# EAGLE board 301_Photodiode_Board_Array (EAGLE 9.6.2)
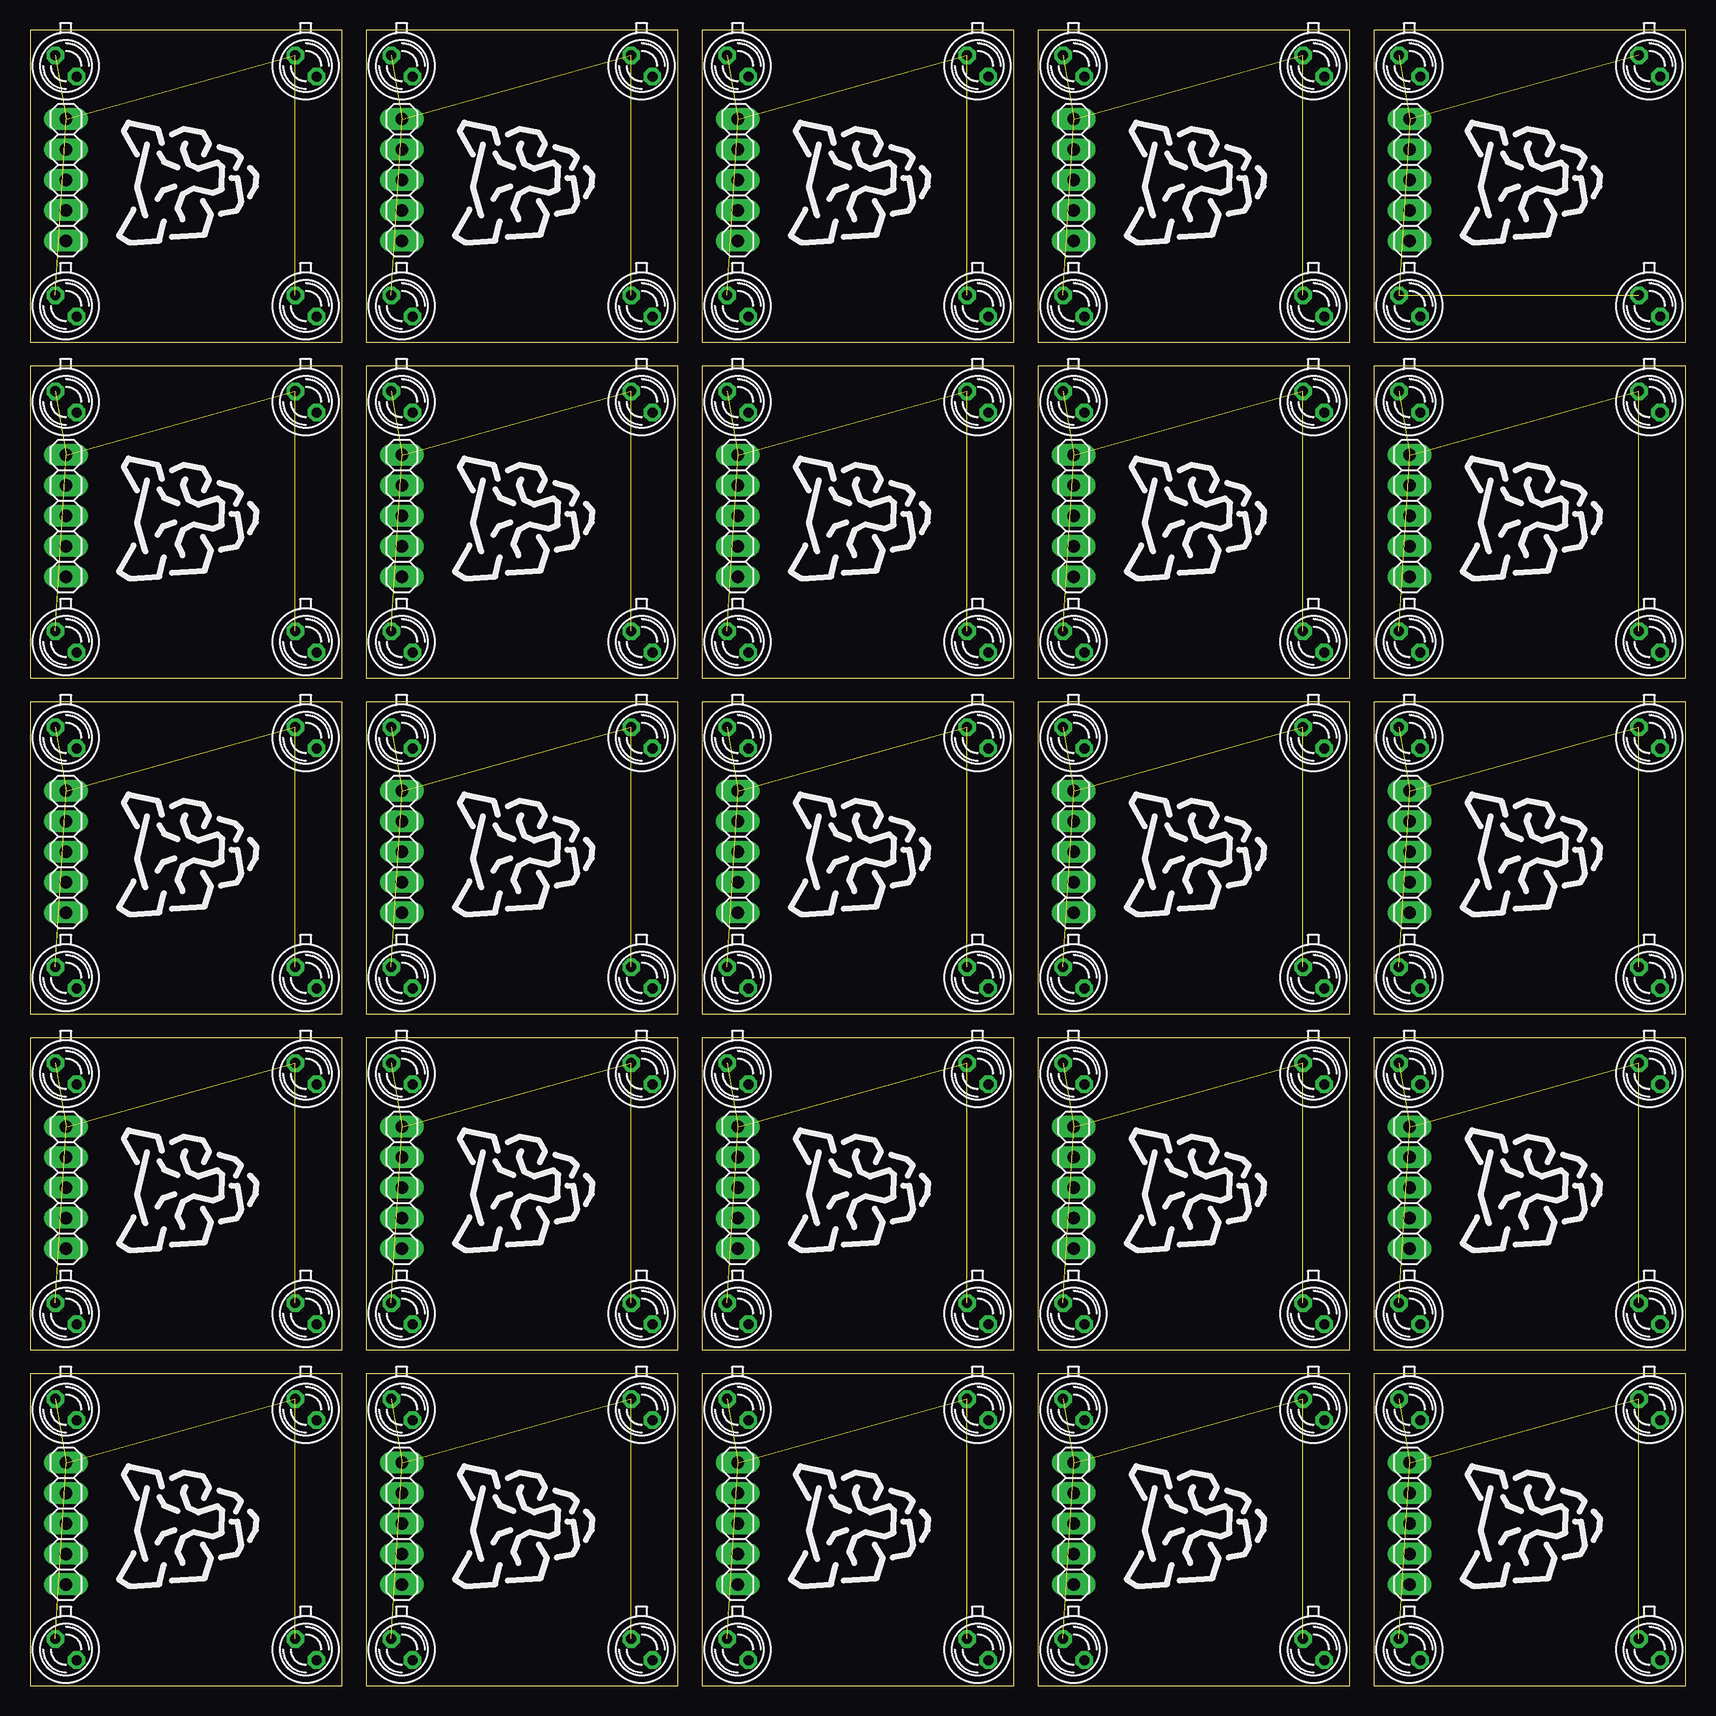
[diagram p0: board, top side]
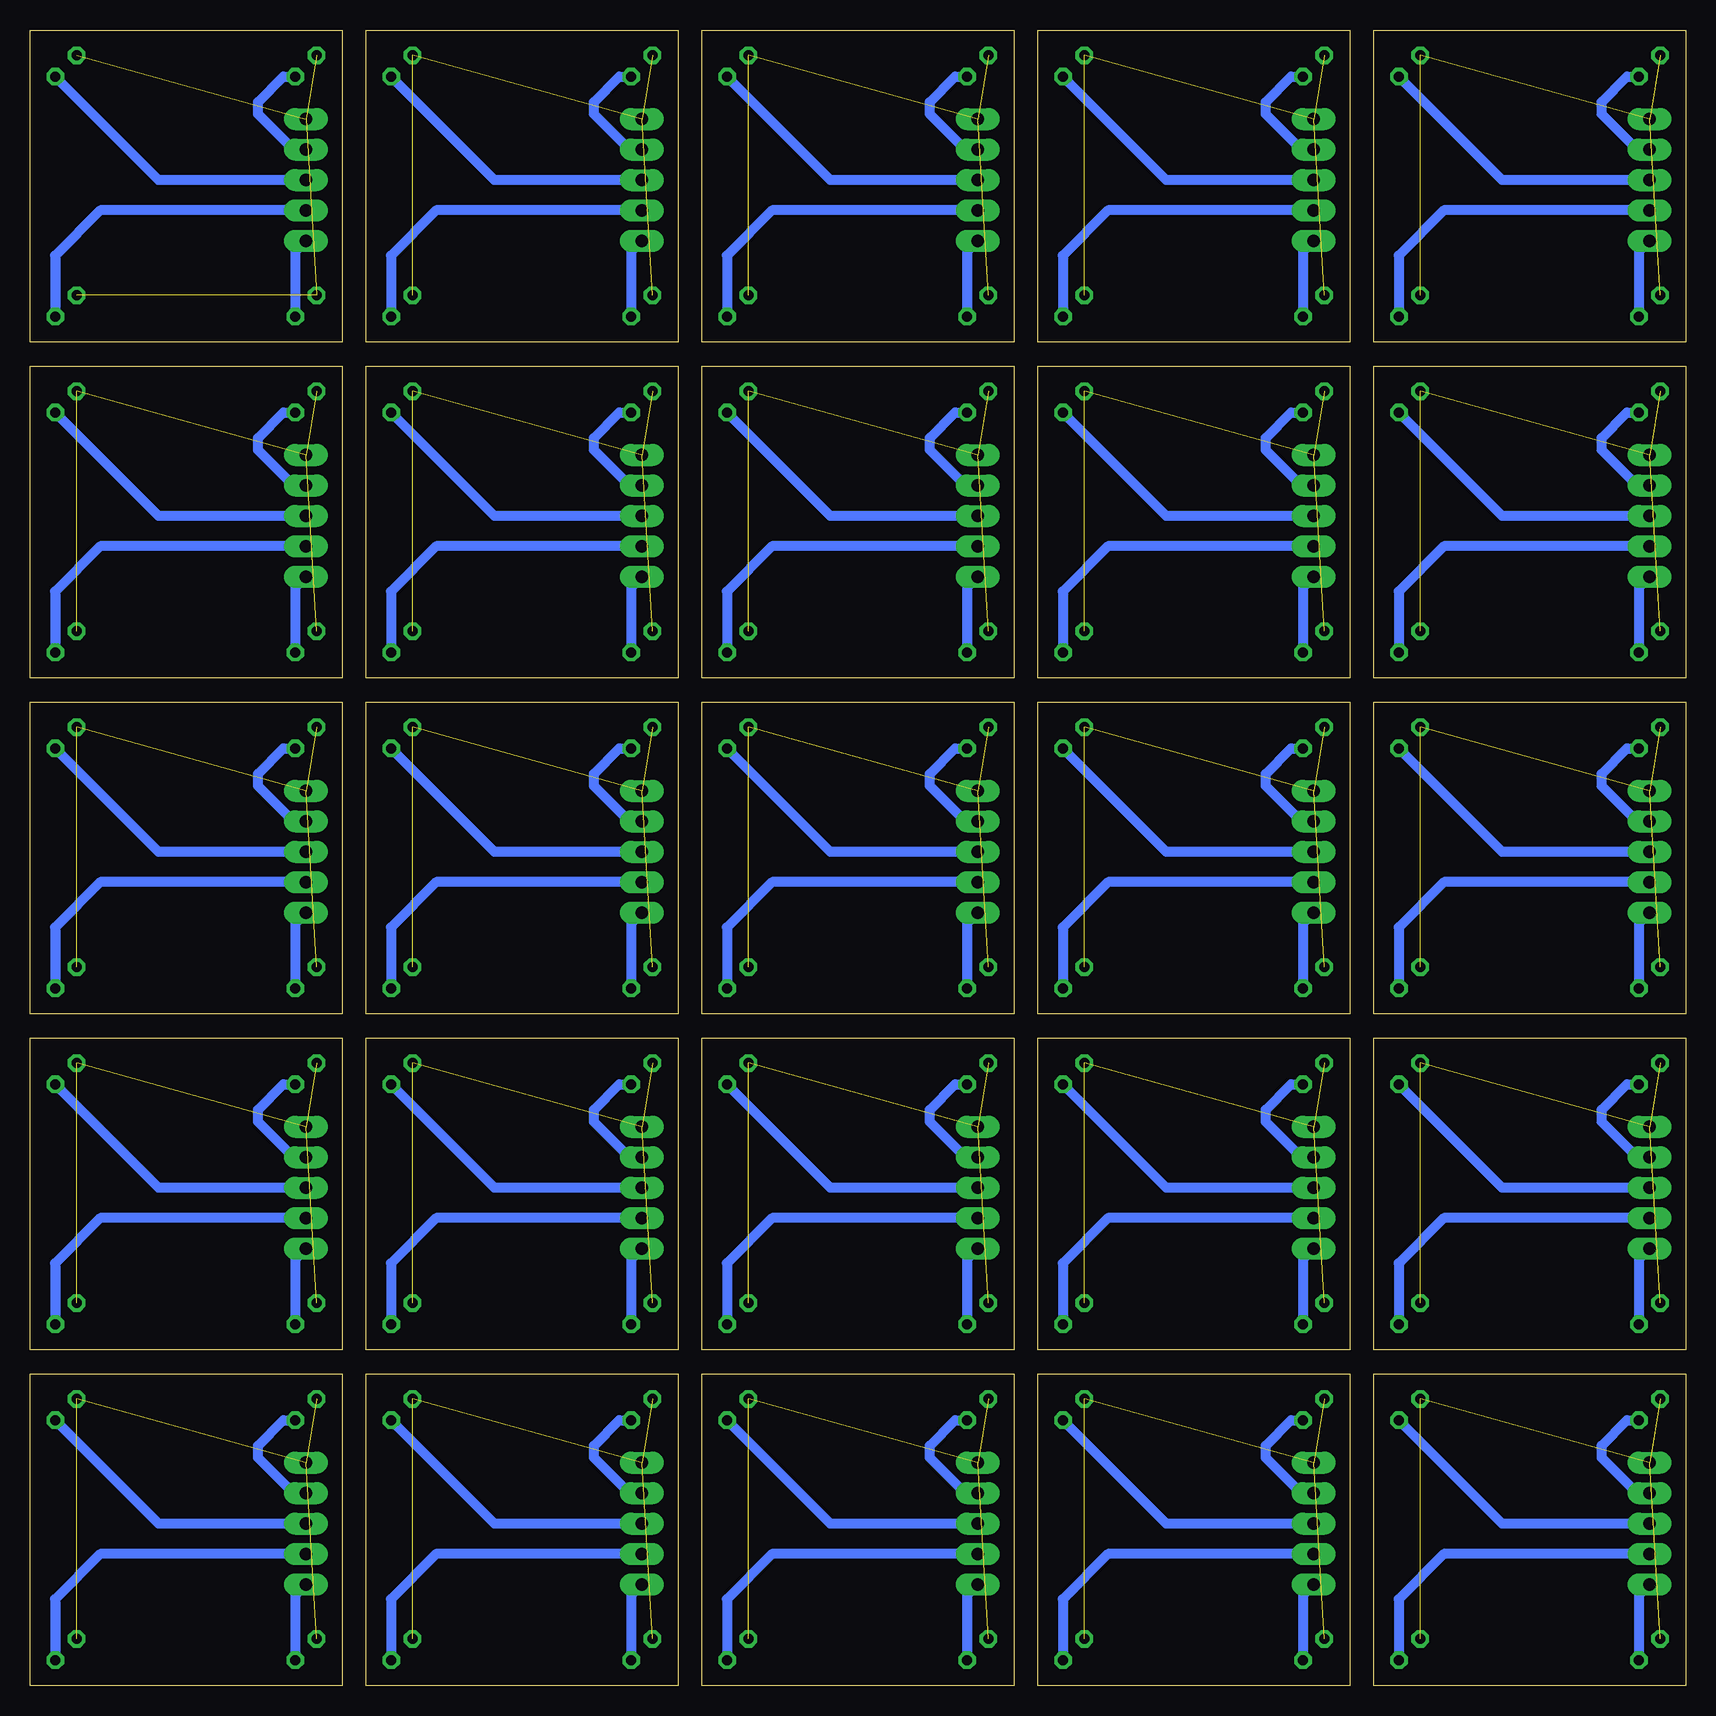
[diagram p1: board, bottom side, seen from below]

Size 138 x 138 mm. Coordinates in mm from the lower left corner, seen from the top.
Outline: 0,0 26,0 26,26 0,26 0,0
Outline: 0,28 26,28 26,54 0,54 0,28
Outline: 0,56 26,56 26,82 0,82 0,56
Outline: 0,84 26,84 26,110 0,110 0,84
Outline: 0,112 26,112 26,138 0,138 0,112
Outline: 28,0 54,0 54,26 28,26 28,0
Outline: 28,28 54,28 54,54 28,54 28,28
Outline: 28,56 54,56 54,82 28,82 28,56
Outline: 28,84 54,84 54,110 28,110 28,84
Outline: 28,112 54,112 54,138 28,138 28,112
Outline: 56,0 82,0 82,26 56,26 56,0
Outline: 56,28 82,28 82,54 56,54 56,28
Outline: 56,56 82,56 82,82 56,82 56,56
Outline: 56,84 82,84 82,110 56,110 56,84
Outline: 84,84 110,84 110,110 84,110 84,84
Outline: 84,56 110,56 110,82 84,82 84,56
Outline: 84,28 110,28 110,54 84,54 84,28
Outline: 84,0 110,0 110,26 84,26 84,0
Outline: 56,112 82,112 82,138 56,138 56,112
Outline: 84,112 110,112 110,138 84,138 84,112
Outline: 112,112 138,112 138,138 112,138 112,112
Outline: 112,84 138,84 138,110 112,110 112,84
Outline: 112,56 138,56 138,82 112,82 112,56
Outline: 112,28 138,28 138,54 112,54 112,28
Outline: 112,0 138,0 138,26 112,26 112,0
Copper layers (1*16): Top 0.035mm / dielectric 1.6mm / Bottom 0.035mm
Design rules "jlcpcb-2layers": minimum track width 5mil, minimum drill 0.3mm, track to track 5mil, track to pad 5mil, pad to pad 5mil, via to via 5mil, smd to smd 5mil, copper to edge 0.2mm, drill to drill 6mil, minimum pad ring 10mil, minimum via ring 3mil, stop-mask expansion 4mil, vias tented up to drill 0mil, thermal gap 10mil

## Footprints (pad centres in the part's own frame; a part is rotated, then mirrored left to right if it is on the bottom)
BPX65 = drill 0.813 octagon: A -0.889,-0.889; K 0.889,0.889
1X05 = drill 1.016 long: 1 -5.08,0; 2 -2.54,0; 3 0,0; 4 2.54,0; 5 5.08,0

## Placement (x,y rotation side)
D1  BPX65  [BPX65]  3,3 270 top
D2  BPX65  [BPX65]  23,3 270 top
D3  BPX65  [BPX65]  23,23 270 top
D4  BPX65  [BPX65]  3,23 270 top
D5  BPX65  [BPX65]  3,31 270 top
D6  BPX65  [BPX65]  23,31 270 top
D7  BPX65  [BPX65]  23,51 270 top
D8  BPX65  [BPX65]  3,51 270 top
D9  BPX65  [BPX65]  3,59 270 top
D10  BPX65  [BPX65]  23,59 270 top
D11  BPX65  [BPX65]  23,79 270 top
D12  BPX65  [BPX65]  3,79 270 top
D13  BPX65  [BPX65]  3,87 270 top
D14  BPX65  [BPX65]  23,87 270 top
D15  BPX65  [BPX65]  23,107 270 top
D16  BPX65  [BPX65]  3,107 270 top
D17  BPX65  [BPX65]  3,115 270 top
D18  BPX65  [BPX65]  23,115 270 top
D19  BPX65  [BPX65]  23,135 270 top
D20  BPX65  [BPX65]  3,135 270 top
D21  BPX65  [BPX65]  31,3 270 top
D22  BPX65  [BPX65]  51,3 270 top
D23  BPX65  [BPX65]  51,23 270 top
D24  BPX65  [BPX65]  31,23 270 top
D25  BPX65  [BPX65]  31,31 270 top
D26  BPX65  [BPX65]  51,31 270 top
D27  BPX65  [BPX65]  51,51 270 top
D28  BPX65  [BPX65]  31,51 270 top
D29  BPX65  [BPX65]  31,59 270 top
D30  BPX65  [BPX65]  51,59 270 top
D31  BPX65  [BPX65]  51,79 270 top
D32  BPX65  [BPX65]  31,79 270 top
D33  BPX65  [BPX65]  31,87 270 top
D34  BPX65  [BPX65]  51,87 270 top
D35  BPX65  [BPX65]  51,107 270 top
D36  BPX65  [BPX65]  31,107 270 top
D37  BPX65  [BPX65]  31,115 270 top
D38  BPX65  [BPX65]  51,115 270 top
D39  BPX65  [BPX65]  51,135 270 top
D40  BPX65  [BPX65]  31,135 270 top
D41  BPX65  [BPX65]  59,3 270 top
D42  BPX65  [BPX65]  79,3 270 top
D43  BPX65  [BPX65]  79,23 270 top
D44  BPX65  [BPX65]  59,23 270 top
D45  BPX65  [BPX65]  59,31 270 top
D46  BPX65  [BPX65]  79,31 270 top
D47  BPX65  [BPX65]  79,51 270 top
D48  BPX65  [BPX65]  59,51 270 top
D49  BPX65  [BPX65]  59,59 270 top
D50  BPX65  [BPX65]  79,59 270 top
D51  BPX65  [BPX65]  79,79 270 top
D52  BPX65  [BPX65]  59,79 270 top
D53  BPX65  [BPX65]  59,87 270 top
D54  BPX65  [BPX65]  79,87 270 top
D55  BPX65  [BPX65]  79,107 270 top
D56  BPX65  [BPX65]  59,107 270 top
D57  BPX65  [BPX65]  87,87 270 top
D58  BPX65  [BPX65]  107,87 270 top
D59  BPX65  [BPX65]  107,107 270 top
D60  BPX65  [BPX65]  87,107 270 top
D61  BPX65  [BPX65]  87,59 270 top
D62  BPX65  [BPX65]  107,59 270 top
D63  BPX65  [BPX65]  107,79 270 top
D64  BPX65  [BPX65]  87,79 270 top
D65  BPX65  [BPX65]  87,31 270 top
D66  BPX65  [BPX65]  107,31 270 top
D67  BPX65  [BPX65]  107,51 270 top
D68  BPX65  [BPX65]  87,51 270 top
D69  BPX65  [BPX65]  87,3 270 top
D70  BPX65  [BPX65]  107,3 270 top
D71  BPX65  [BPX65]  107,23 270 top
D72  BPX65  [BPX65]  87,23 270 top
D73  BPX65  [BPX65]  59,115 270 top
D74  BPX65  [BPX65]  79,115 270 top
D75  BPX65  [BPX65]  79,135 270 top
D76  BPX65  [BPX65]  59,135 270 top
D77  BPX65  [BPX65]  87,115 270 top
D78  BPX65  [BPX65]  107,115 270 top
D79  BPX65  [BPX65]  107,135 270 top
D80  BPX65  [BPX65]  87,135 270 top
D81  BPX65  [BPX65]  115,115 270 top
D82  BPX65  [BPX65]  135,115 270 top
D83  BPX65  [BPX65]  135,135 270 top
D84  BPX65  [BPX65]  115,135 270 top
D85  BPX65  [BPX65]  115,87 270 top
D86  BPX65  [BPX65]  135,87 270 top
D87  BPX65  [BPX65]  135,107 270 top
D88  BPX65  [BPX65]  115,107 270 top
D89  BPX65  [BPX65]  115,59 270 top
D90  BPX65  [BPX65]  135,59 270 top
D91  BPX65  [BPX65]  135,79 270 top
D92  BPX65  [BPX65]  115,79 270 top
D93  BPX65  [BPX65]  115,31 270 top
D94  BPX65  [BPX65]  135,31 270 top
D95  BPX65  [BPX65]  135,51 270 top
D96  BPX65  [BPX65]  115,51 270 top
D97  BPX65  [BPX65]  115,3 270 top
D98  BPX65  [BPX65]  135,3 270 top
D99  BPX65  [BPX65]  135,23 270 top
D100  BPX65  [BPX65]  115,23 270 top
JP1  [1X05]  3,13.5 90 top
JP2  [1X05]  3,41.5 90 top
JP3  [1X05]  3,69.5 90 top
JP4  [1X05]  3,97.5 90 top
JP5  [1X05]  3,125.5 90 top
JP6  [1X05]  31,13.5 90 top
JP7  [1X05]  31,41.5 90 top
JP8  [1X05]  31,69.5 90 top
JP9  [1X05]  31,97.5 90 top
JP10  [1X05]  31,125.5 90 top
JP11  [1X05]  59,13.5 90 top
JP12  [1X05]  59,41.5 90 top
JP13  [1X05]  59,69.5 90 top
JP14  [1X05]  59,97.5 90 top
JP15  [1X05]  87,97.5 90 top
JP16  [1X05]  87,69.5 90 top
JP17  [1X05]  87,41.5 90 top
JP18  [1X05]  87,13.5 90 top
JP19  [1X05]  59,125.5 90 top
JP20  [1X05]  87,125.5 90 top
JP21  [1X05]  115,125.5 90 top
JP22  [1X05]  115,97.5 90 top
JP23  [1X05]  115,69.5 90 top
JP24  [1X05]  115,41.5 90 top
JP25  [1X05]  115,13.5 90 top
U$1  COUGAR_LOGO_LARGE  [LRG_COUGAR]  19.11,35.89 90 top
U$2  COUGAR_LOGO_LARGE  [LRG_COUGAR]  19.11,7.89 90 top
U$3  COUGAR_LOGO_LARGE  [LRG_COUGAR]  19.11,63.89 90 top
U$4  COUGAR_LOGO_LARGE  [LRG_COUGAR]  19.11,91.89 90 top
U$5  COUGAR_LOGO_LARGE  [LRG_COUGAR]  19.11,119.89 90 top
U$6  COUGAR_LOGO_LARGE  [LRG_COUGAR]  47.11,7.89 90 top
U$7  COUGAR_LOGO_LARGE  [LRG_COUGAR]  47.11,35.89 90 top
U$8  COUGAR_LOGO_LARGE  [LRG_COUGAR]  47.11,63.89 90 top
U$9  COUGAR_LOGO_LARGE  [LRG_COUGAR]  47.11,91.89 90 top
U$10  COUGAR_LOGO_LARGE  [LRG_COUGAR]  47.11,119.89 90 top
U$11  COUGAR_LOGO_LARGE  [LRG_COUGAR]  75.11,7.89 90 top
U$12  COUGAR_LOGO_LARGE  [LRG_COUGAR]  75.11,35.89 90 top
U$13  COUGAR_LOGO_LARGE  [LRG_COUGAR]  75.11,63.89 90 top
U$14  COUGAR_LOGO_LARGE  [LRG_COUGAR]  75.11,91.89 90 top
U$15  COUGAR_LOGO_LARGE  [LRG_COUGAR]  103.11,91.89 90 top
U$16  COUGAR_LOGO_LARGE  [LRG_COUGAR]  103.11,63.89 90 top
U$17  COUGAR_LOGO_LARGE  [LRG_COUGAR]  103.11,35.89 90 top
U$18  COUGAR_LOGO_LARGE  [LRG_COUGAR]  103.11,7.89 90 top
U$19  COUGAR_LOGO_LARGE  [LRG_COUGAR]  75.11,119.89 90 top
U$20  COUGAR_LOGO_LARGE  [LRG_COUGAR]  103.11,119.89 90 top
U$21  COUGAR_LOGO_LARGE  [LRG_COUGAR]  131.11,119.89 90 top
U$22  COUGAR_LOGO_LARGE  [LRG_COUGAR]  131.11,91.89 90 top
U$23  COUGAR_LOGO_LARGE  [LRG_COUGAR]  131.11,63.89 90 top
U$24  COUGAR_LOGO_LARGE  [LRG_COUGAR]  131.11,35.89 90 top
U$25  COUGAR_LOGO_LARGE  [LRG_COUGAR]  131.11,7.89 90 top

## Library data of the parts
D1-D100 = opto-trans-siemens; MPN: BPX65.; OC_FARNELL: 327451; OC_NEWARK: 06WX2764
JP1-JP25 = pinhead
U$1-U$25 = ElcPartsLibrary

## Nets
DIODE_1: D1.K JP1.1
DIODE_2: D2.K JP1.2
DIODE_3: D3.K JP1.3
DIODE_4: D4.K JP1.4
DIODE_5: D5.K JP2.1
DIODE_6: D6.K JP2.2
DIODE_7: D7.K JP2.3
DIODE_8: D8.K JP2.4
DIODE_9: D9.K JP3.1
DIODE_10: D10.K JP3.2
DIODE_11: D11.K JP3.3
DIODE_12: D12.K JP3.4
DIODE_13: D13.K JP4.1
DIODE_14: D14.K JP4.2
DIODE_15: D15.K JP4.3
DIODE_16: D16.K JP4.4
DIODE_17: D17.K JP5.1
DIODE_18: D18.K JP5.2
DIODE_19: D19.K JP5.3
DIODE_20: D20.K JP5.4
DIODE_21: D21.K JP6.1
DIODE_22: D22.K JP6.2
DIODE_23: D23.K JP6.3
DIODE_24: D24.K JP6.4
DIODE_25: D25.K JP7.1
DIODE_26: D26.K JP7.2
DIODE_27: D27.K JP7.3
DIODE_28: D28.K JP7.4
DIODE_29: D29.K JP8.1
DIODE_30: D30.K JP8.2
DIODE_31: D31.K JP8.3
DIODE_32: D32.K JP8.4
DIODE_33: D33.K JP9.1
DIODE_34: D34.K JP9.2
DIODE_35: D35.K JP9.3
DIODE_36: D36.K JP9.4
DIODE_37: D37.K JP10.1
DIODE_38: D38.K JP10.2
DIODE_39: D39.K JP10.3
DIODE_40: D40.K JP10.4
DIODE_41: D41.K JP11.1
DIODE_42: D42.K JP11.2
DIODE_43: D43.K JP11.3
DIODE_44: D44.K JP11.4
DIODE_45: D45.K JP12.1
DIODE_46: D46.K JP12.2
DIODE_47: D47.K JP12.3
DIODE_48: D48.K JP12.4
DIODE_49: D49.K JP13.1
DIODE_50: D50.K JP13.2
DIODE_51: D51.K JP13.3
DIODE_52: D52.K JP13.4
DIODE_53: D53.K JP14.1
DIODE_54: D54.K JP14.2
DIODE_55: D55.K JP14.3
DIODE_56: D56.K JP14.4
DIODE_57: D57.K JP15.1
DIODE_58: D58.K JP15.2
DIODE_59: D59.K JP15.3
DIODE_60: D60.K JP15.4
DIODE_61: D61.K JP16.1
DIODE_62: D62.K JP16.2
DIODE_63: D63.K JP16.3
DIODE_64: D64.K JP16.4
DIODE_65: D65.K JP17.1
DIODE_66: D66.K JP17.2
DIODE_67: D67.K JP17.3
DIODE_68: D68.K JP17.4
DIODE_69: D69.K JP18.1
DIODE_70: D70.K JP18.2
DIODE_71: D71.K JP18.3
DIODE_72: D72.K JP18.4
DIODE_73: D73.K JP19.1
DIODE_74: D74.K JP19.2
DIODE_75: D75.K JP19.3
DIODE_76: D76.K JP19.4
DIODE_77: D77.K JP20.1
DIODE_78: D78.K JP20.2
DIODE_79: D79.K JP20.3
DIODE_80: D80.K JP20.4
DIODE_81: D81.K JP21.1
DIODE_82: D82.K JP21.2
DIODE_83: D83.K JP21.3
DIODE_84: D84.K JP21.4
DIODE_85: D85.K JP22.1
DIODE_86: D86.K JP22.2
DIODE_87: D87.K JP22.3
DIODE_88: D88.K JP22.4
DIODE_89: D89.K JP23.1
DIODE_90: D90.K JP23.2
DIODE_91: D91.K JP23.3
DIODE_92: D92.K JP23.4
DIODE_93: D93.K JP24.1
DIODE_94: D94.K JP24.2
DIODE_95: D95.K JP24.3
DIODE_96: D96.K JP24.4
DIODE_97: D97.K JP25.1
DIODE_98: D98.K JP25.2
DIODE_99: D99.K JP25.3
DIODE_100: D100.K JP25.4
GND: D1.A D2.A D3.A D4.A JP1.5
GND1: D5.A D6.A D7.A D8.A JP2.5
GND2: D9.A D10.A D11.A D12.A JP3.5
GND3: D13.A D14.A D15.A D16.A JP4.5
GND4: D17.A D18.A D19.A D20.A JP5.5
GND5: D21.A D22.A D23.A D24.A JP6.5
GND6: D25.A D26.A D27.A D28.A JP7.5
GND7: D29.A D30.A D31.A D32.A JP8.5
GND8: D33.A D34.A D35.A D36.A JP9.5
GND9: D37.A D38.A D39.A D40.A JP10.5
GND10: D41.A D42.A D43.A D44.A JP11.5
GND11: D45.A D46.A D47.A D48.A JP12.5
GND12: D49.A D50.A D51.A D52.A JP13.5
GND13: D53.A D54.A D55.A D56.A JP14.5
GND14: D57.A D58.A D59.A D60.A JP15.5
GND15: D61.A D62.A D63.A D64.A JP16.5
GND16: D65.A D66.A D67.A D68.A JP17.5
GND17: D69.A D70.A D71.A D72.A JP18.5
GND18: D73.A D74.A D75.A D76.A JP19.5
GND19: D77.A D78.A D79.A D80.A JP20.5
GND20: D81.A D82.A D83.A D84.A JP21.5
GND21: D85.A D86.A D87.A D88.A JP22.5
GND22: D89.A D90.A D91.A D92.A JP23.5
GND23: D93.A D94.A D95.A D96.A JP24.5
GND24: D97.A D98.A D99.A D100.A JP25.5

## Tracks (layer width: path | path; a pad name or v marks a point on that pad's centre or on a via)
DIODE_1
  Bottom 0.813: JP1.1 3.89,7.53 D1.K
DIODE_2
  Bottom 0.813: JP1.2 20.14,10.96 23.9,7.2 23.9,2.12 D2.K
DIODE_3
  Bottom 0.813: JP1.3 15.28,13.5 D3.K
DIODE_4
  Bottom 0.813: JP1.4 4.04,16.04 7,19 7,20 4.89,22.11 D4.K
DIODE_5
  Bottom 0.813: JP2.1 3.89,35.53 D5.K
DIODE_6
  Bottom 0.813: JP2.2 20.14,38.96 23.9,35.2 23.9,30.12 D6.K
DIODE_7
  Bottom 0.813: JP2.3 15.28,41.5 D7.K
DIODE_8
  Bottom 0.813: JP2.4 4.04,44.04 7,47 7,48 4.89,50.11 D8.K
DIODE_9
  Bottom 0.813: JP3.1 3.89,63.53 D9.K
DIODE_10
  Bottom 0.813: JP3.2 20.14,66.96 23.9,63.2 23.9,58.12 D10.K
DIODE_11
  Bottom 0.813: JP3.3 15.28,69.5 D11.K
DIODE_12
  Bottom 0.813: JP3.4 4.04,72.04 7,75 7,76 4.89,78.11 D12.K
DIODE_13
  Bottom 0.813: JP4.1 3.89,91.53 D13.K
DIODE_14
  Bottom 0.813: JP4.2 20.14,94.96 23.9,91.2 23.9,86.12 D14.K
DIODE_15
  Bottom 0.813: JP4.3 15.28,97.5 D15.K
DIODE_16
  Bottom 0.813: JP4.4 4.04,100.04 7,103 7,104 4.89,106.11 D16.K
DIODE_17
  Bottom 0.813: JP5.1 3.89,119.53 D17.K
DIODE_18
  Bottom 0.813: JP5.2 20.14,122.96 23.9,119.2 23.9,114.12 D18.K
DIODE_19
  Bottom 0.813: JP5.3 15.28,125.5 D19.K
DIODE_20
  Bottom 0.813: JP5.4 4.04,128.04 7,131 7,132 4.89,134.11 D20.K
DIODE_21
  Bottom 0.813: JP6.1 31.89,7.53 D21.K
DIODE_22
  Bottom 0.813: JP6.2 48.14,10.96 51.9,7.2 51.9,2.12 D22.K
DIODE_23
  Bottom 0.813: JP6.3 43.28,13.5 D23.K
DIODE_24
  Bottom 0.813: JP6.4 32.04,16.04 35,19 35,20 32.89,22.11 D24.K
DIODE_25
  Bottom 0.813: JP7.1 31.89,35.53 D25.K
DIODE_26
  Bottom 0.813: JP7.2 48.14,38.96 51.9,35.2 51.9,30.12 D26.K
DIODE_27
  Bottom 0.813: JP7.3 43.28,41.5 D27.K
DIODE_28
  Bottom 0.813: JP7.4 32.04,44.04 35,47 35,48 32.89,50.11 D28.K
DIODE_29
  Bottom 0.813: JP8.1 31.89,63.53 D29.K
DIODE_30
  Bottom 0.813: JP8.2 48.14,66.96 51.9,63.2 51.9,58.12 D30.K
DIODE_31
  Bottom 0.813: JP8.3 43.28,69.5 D31.K
DIODE_32
  Bottom 0.813: JP8.4 32.04,72.04 35,75 35,76 32.89,78.11 D32.K
DIODE_33
  Bottom 0.813: JP9.1 31.89,91.53 D33.K
DIODE_34
  Bottom 0.813: JP9.2 48.14,94.96 51.9,91.2 51.9,86.12 D34.K
DIODE_35
  Bottom 0.813: JP9.3 43.28,97.5 D35.K
DIODE_36
  Bottom 0.813: JP9.4 32.04,100.04 35,103 35,104 32.89,106.11 D36.K
DIODE_37
  Bottom 0.813: JP10.1 31.89,119.53 D37.K
DIODE_38
  Bottom 0.813: JP10.2 48.14,122.96 51.9,119.2 51.9,114.12 D38.K
DIODE_39
  Bottom 0.813: JP10.3 43.28,125.5 D39.K
DIODE_40
  Bottom 0.813: JP10.4 32.04,128.04 35,131 35,132 32.89,134.11 D40.K
DIODE_41
  Bottom 0.813: JP11.1 59.89,7.53 D41.K
DIODE_42
  Bottom 0.813: JP11.2 76.14,10.96 79.9,7.2 79.9,2.12 D42.K
DIODE_43
  Bottom 0.813: JP11.3 71.28,13.5 D43.K
DIODE_44
  Bottom 0.813: JP11.4 60.04,16.04 63,19 63,20 60.89,22.11 D44.K
DIODE_45
  Bottom 0.813: JP12.1 59.89,35.53 D45.K
DIODE_46
  Bottom 0.813: JP12.2 76.14,38.96 79.9,35.2 79.9,30.12 D46.K
DIODE_47
  Bottom 0.813: JP12.3 71.28,41.5 D47.K
DIODE_48
  Bottom 0.813: JP12.4 60.04,44.04 63,47 63,48 60.89,50.11 D48.K
DIODE_49
  Bottom 0.813: JP13.1 59.89,63.53 D49.K
DIODE_50
  Bottom 0.813: JP13.2 76.14,66.96 79.9,63.2 79.9,58.12 D50.K
DIODE_51
  Bottom 0.813: JP13.3 71.28,69.5 D51.K
DIODE_52
  Bottom 0.813: JP13.4 60.04,72.04 63,75 63,76 60.89,78.11 D52.K
DIODE_53
  Bottom 0.813: JP14.1 59.89,91.53 D53.K
DIODE_54
  Bottom 0.813: JP14.2 76.14,94.96 79.9,91.2 79.9,86.12 D54.K
DIODE_55
  Bottom 0.813: JP14.3 71.28,97.5 D55.K
DIODE_56
  Bottom 0.813: JP14.4 60.04,100.04 63,103 63,104 60.89,106.11 D56.K
DIODE_57
  Bottom 0.813: JP15.1 87.89,91.53 D57.K
DIODE_58
  Bottom 0.813: JP15.2 104.14,94.96 107.9,91.2 107.9,86.12 D58.K
DIODE_59
  Bottom 0.813: JP15.3 99.28,97.5 D59.K
DIODE_60
  Bottom 0.813: JP15.4 88.04,100.04 91,103 91,104 88.89,106.11 D60.K
DIODE_61
  Bottom 0.813: JP16.1 87.89,63.53 D61.K
DIODE_62
  Bottom 0.813: JP16.2 104.14,66.96 107.9,63.2 107.9,58.12 D62.K
DIODE_63
  Bottom 0.813: JP16.3 99.28,69.5 D63.K
DIODE_64
  Bottom 0.813: JP16.4 88.04,72.04 91,75 91,76 88.89,78.11 D64.K
DIODE_65
  Bottom 0.813: JP17.1 87.89,35.53 D65.K
DIODE_66
  Bottom 0.813: JP17.2 104.14,38.96 107.9,35.2 107.9,30.12 D66.K
DIODE_67
  Bottom 0.813: JP17.3 99.28,41.5 D67.K
DIODE_68
  Bottom 0.813: JP17.4 88.04,44.04 91,47 91,48 88.89,50.11 D68.K
DIODE_69
  Bottom 0.813: JP18.1 87.89,7.53 D69.K
DIODE_70
  Bottom 0.813: JP18.2 104.14,10.96 107.9,7.2 107.9,2.12 D70.K
DIODE_71
  Bottom 0.813: JP18.3 99.28,13.5 D71.K
DIODE_72
  Bottom 0.813: JP18.4 88.04,16.04 91,19 91,20 88.89,22.11 D72.K
DIODE_73
  Bottom 0.813: JP19.1 59.89,119.53 D73.K
DIODE_74
  Bottom 0.813: JP19.2 76.14,122.96 79.9,119.2 79.9,114.12 D74.K
DIODE_75
  Bottom 0.813: JP19.3 71.28,125.5 D75.K
DIODE_76
  Bottom 0.813: JP19.4 60.04,128.04 63,131 63,132 60.89,134.11 D76.K
DIODE_77
  Bottom 0.813: JP20.1 87.89,119.53 D77.K
DIODE_78
  Bottom 0.813: JP20.2 104.14,122.96 107.9,119.2 107.9,114.12 D78.K
DIODE_79
  Bottom 0.813: JP20.3 99.28,125.5 D79.K
DIODE_80
  Bottom 0.813: JP20.4 88.04,128.04 91,131 91,132 88.89,134.11 D80.K
DIODE_81
  Bottom 0.813: JP21.1 115.89,119.53 D81.K
DIODE_82
  Bottom 0.813: JP21.2 132.14,122.96 135.9,119.2 135.9,114.12 D82.K
DIODE_83
  Bottom 0.813: JP21.3 127.28,125.5 D83.K
DIODE_84
  Bottom 0.813: JP21.4 116.04,128.04 119,131 119,132 116.89,134.11 D84.K
DIODE_85
  Bottom 0.813: JP22.1 115.89,91.53 D85.K
DIODE_86
  Bottom 0.813: JP22.2 132.14,94.96 135.9,91.2 135.9,86.12 D86.K
DIODE_87
  Bottom 0.813: JP22.3 127.28,97.5 D87.K
DIODE_88
  Bottom 0.813: JP22.4 116.04,100.04 119,103 119,104 116.89,106.11 D88.K
DIODE_89
  Bottom 0.813: JP23.1 115.89,63.53 D89.K
DIODE_90
  Bottom 0.813: JP23.2 132.14,66.96 135.9,63.2 135.9,58.12 D90.K
DIODE_91
  Bottom 0.813: JP23.3 127.28,69.5 D91.K
DIODE_92
  Bottom 0.813: JP23.4 116.04,72.04 119,75 119,76 116.89,78.11 D92.K
DIODE_93
  Bottom 0.813: JP24.1 115.89,35.53 D93.K
DIODE_94
  Bottom 0.813: JP24.2 132.14,38.96 135.9,35.2 135.9,30.12 D94.K
DIODE_95
  Bottom 0.813: JP24.3 127.28,41.5 D95.K
DIODE_96
  Bottom 0.813: JP24.4 116.04,44.04 119,47 119,48 116.89,50.11 D96.K
DIODE_97
  Bottom 0.813: JP25.1 115.89,7.53 D97.K
DIODE_98
  Bottom 0.813: JP25.2 132.14,10.96 135.9,7.2 135.9,2.12 D98.K
DIODE_99
  Bottom 0.813: JP25.3 127.28,13.5 D99.K
DIODE_100
  Bottom 0.813: JP25.4 116.04,16.04 119,19 119,20 116.89,22.11 D100.K
GND  (4 unrouted)
GND1  (4 unrouted)
GND2  (4 unrouted)
GND3  (4 unrouted)
GND4  (4 unrouted)
GND5  (4 unrouted)
GND6  (4 unrouted)
GND7  (4 unrouted)
GND8  (4 unrouted)
GND9  (4 unrouted)
GND10  (4 unrouted)
GND11  (4 unrouted)
GND12  (4 unrouted)
GND13  (4 unrouted)
GND14  (4 unrouted)
GND15  (4 unrouted)
GND16  (4 unrouted)
GND17  (4 unrouted)
GND18  (4 unrouted)
GND19  (4 unrouted)
GND20  (4 unrouted)
GND21  (4 unrouted)
GND22  (4 unrouted)
GND23  (4 unrouted)
GND24  (4 unrouted)